# Altium PCB 板.PcbDoc (part 3 of 3)
Units mil, origin at the board's own origin, x right, y up, seen from the top; angles counter-clockwise.
Board outline 8500 x 4400 mil, 4 copper layers (Top Layer, 02gnd, 03vcc, Bottom Layer); 131 components, 485 nets, 1153 pads, 930 vias.
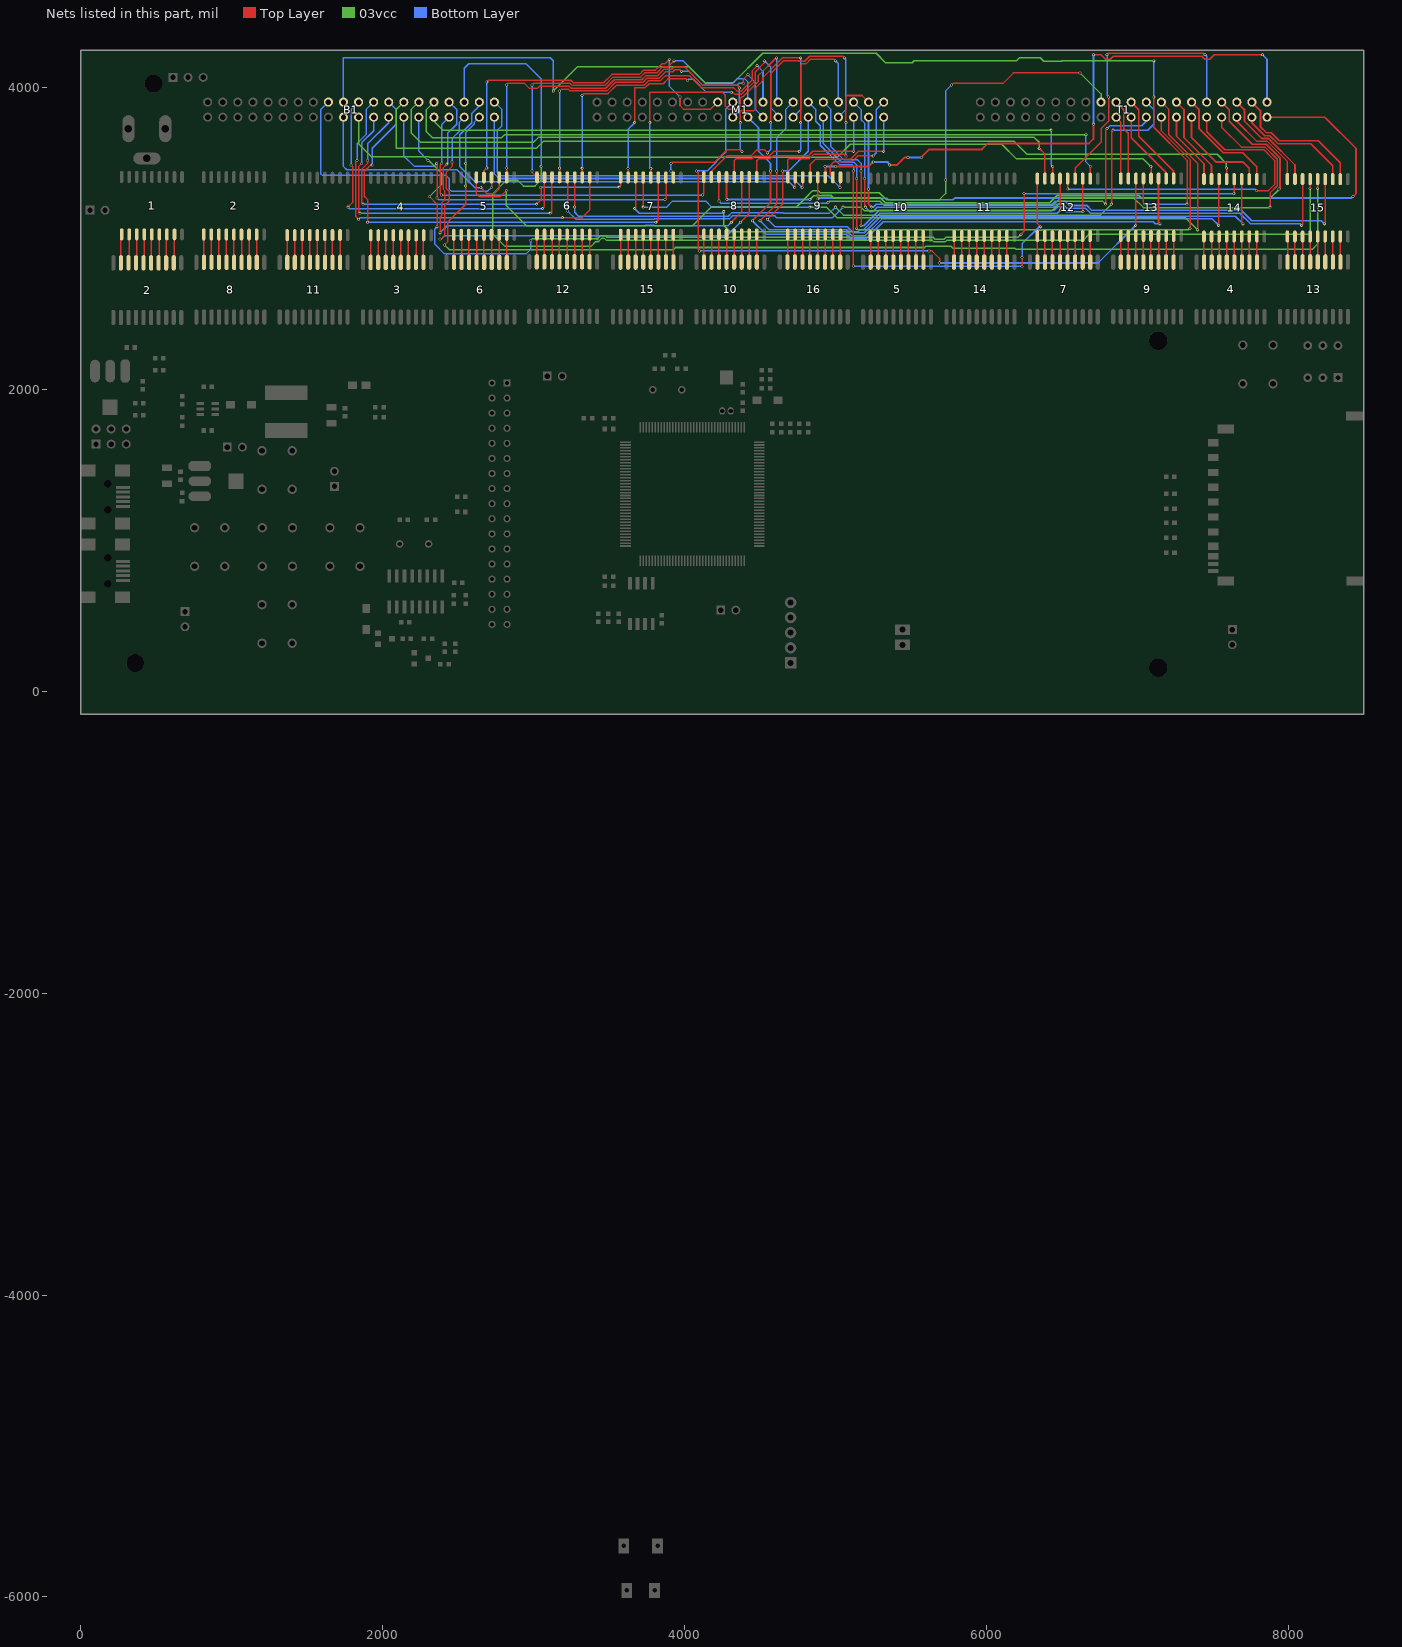
[diagram p5: the nets of this part, all layers, seen from the top]

## Via types
v1: diameter 19.68, hole 11.81, Top Layer to Bottom Layer, 922 vias
v2: diameter 118.11, hole 118.11, Top Layer to Bottom Layer, tented both sides, 4 vias
v3: diameter 50, hole 40, Top Layer to Bottom Layer, 2 vias
v4: diameter 39.37, hole 39.37, Top Layer to Bottom Layer, 2 vias

## Nets (pads, with @x,y where several pads share a name; then routed paths per layer and width w, separated by ;. In a path a pad name is that pad's centre, name@x,y a point inside that pad or via, vN(x,y) a via of type N, cw(c..) or ccw(c..) an arc to the next point about the centre after c; other vN are vias at no path point) (continued)
W52: 5.15@2621,3407 T1.29 | length 5405.5
  Top Layer w10: 5.15@2621,3407 2621,3299 2640,3280 2780,3280 v1(2820,3320) ; v1(5770,4020) 5780,4030 6110,4030 6180,4100 v1(6620,4100)
  03vcc w10: v1(2820,3320) 2820,3220 2952.72,3087.28 4052.72,3087.28 4175.43,3210 4740,3210 4796.22,3266.22 4850,3320 4886.56,3320 4900.86,3305.7 5290.86,3305.7 5336.56,3260 5690,3260 5730,3300 v1(5730,3390) ; v1(6620,4100) 6760,3960 T1.29@6760,3906.42
  Bottom Layer w10: v1(5730,3390) 5730,3980 v1(5770,4020)
W53: 5.14@2671,3407 M1.29 | length 2497.9
  Top Layer w10: 2671,3451 v1(2690,3470) ; v1(2690,4040) 2701.26,4051.26 3246.52,4051.26 3263.49,4034.29 3463.36,4034.29 3519.11,4090.04 3701.54,4090.04 3730,4118.5 3808.5,4118.5 3850,4160 3870,4160 v1(3900,4190) ; v1(3970,3940) 3970,3882.91 3992.91,3860 4173.58,3860 M1.29@4220,3906.42
  Bottom Layer w10: v1(2690,3470) v1(2690,4040) ; v1(3900,4190) 3900,4010 v1(3970,3940)
W54: 5.13@2721,3407 B1.29 | length 1792.5
  Top Layer w10: v1(2720,3340) 2721,3341 5.13@2721,3407
  Bottom Layer w10: B1.29@1640,3906.42 1590,3856.42 1590,3430 1600,3420 2420,3420 2440,3400 2440,3330 2453.72,3316.28 2696.28,3316.28 v1(2720,3340)
W55: 5.12@2771,3407 B1.10 | length 1520.8
  Top Layer w10: v1(2650,3340) 2690,3300 2740,3300 2771,3331 5.12@2771,3407
  Bottom Layer w10: B1.10@1740,3806.42 1740,3480 1762.13,3457.87 2492.13,3457.87 2610,3340 v1(2650,3340)
W56: 5.11@2821,3407 M1.10 | length 2519.9
  Top Layer w10: v1(2820,4020) 2830,4030 2940,4030 2972.72,3997.28 3025.16,3997.28 3040,4012.13 3235.1,4012.13 3248.68,3998.54 3478.17,3998.54 3533.92,4054.29 3716.34,4054.29 3744.18,4082.13 3822.68,4082.13 3864.81,4124.25 3914.81,4124.25 3930.56,4140 3999.49,4140 4122.76,4016.74 4356.74,4016.74 4356.74,4006.14 v1(4362.87,4000) ; 5.11@2821,3407 v1(2821,3469)
  Bottom Layer w10: v1(2820,4020) 2821,4019 v1(2821,3469) ; M1.10@4320,3806.42 4362.87,3849.29 v1(4362.87,4000)
W57: 13.18@6891.3,3400 T1.10 | length 419.4
  Top Layer w10: T1.10@6860,3806.42 6891.3,3775.12 13.18@6891.3,3400
W58: 13.17@6941.3,3400 T1.30 | length 540.1
  Top Layer w11.81: T1.30@6860,3906.42 6910,3856.42 6910,3782.98 6910.08,3782.9 6910.08,3729.92 6940.32,3699.69 6940.32,3400.98 13.17@6941.3,3400
W59: 13.16@6991.3,3400 M1.30 | length 4489.9
  Top Layer w10: v1(4080,3450) 4090,3440 4090,2930 v1(4100,2920) ; v1(5620,2920) 5640,2920 5690,2870 v1(5690,2840) ; v1(6990,3090) 6990,3398.7 13.16@6991.3,3400
  Bottom Layer w10: v1(4080,3450) 4150,3450 4271.79,3571.79 4271.79,3858.21 M1.30@4320,3906.42 ; v1(4100,2920) v1(5620,2920) ; v1(5690,2840) 6740,2840 v1(6990,3090)
W60: 13.15@7041.3,3400 B1.30 | length 7611.3
  Top Layer w10: 13.15@7041.3,3400 7041.3,3238.7 v1(7050,3230) ; v1(7110,3940) 7110,3740 7330,3520 v1(7330,3230)
  03vcc w10: v1(3130,3980) 3290,4140 4030,4140 4140,4030 4317.75,4030 4517.75,4230 5270,4230 5332.72,4167.28 5509.41,4167.28 5522.13,4180 6200,4180 6220,4200 6357.87,4200 6380.59,4177.28 6499.41,4177.28 6502.13,4180 v1(7110,4180)
  Bottom Layer w10: B1.30@1740,3906.42 1740,4200 3110,4200 3130,4180 v1(3130,3980) ; v1(7050,3230) v1(7330,3230) ; v1(7110,3940) v1(7110,4180)
W61: 13.14@7091.3,3400 B1.11 | length 5641.6
  Top Layer w10: v1(7090,3480) 7091.3,3478.7 13.14@7091.3,3400
  03vcc w10: B1.11@1840,3806.42 1840,3630 1927.28,3542.72 2309.41,3542.72 2312.13,3540 5010,3540 5097.56,3627.56 6102.44,3627.56 6200,3530 7040,3530 v1(7090,3480)
W62: 13.13@7141.3,3400 M1.11 | length 3904.3
  Top Layer w11.81: v1(4450,3120) 4570,3240 v1(4570,3450) ; 13.13@7141.3,3400 7141.3,3108.7 v1(7150,3100)
  Bottom Layer w11.81: M1.11@4420,3806.42 4490,3736.42 4490,3580 4570,3500 v1(4570,3450) ; v1(4450,3120) 4540,3030 5070,3030 5100,3000 5202.39,3000 5316.01,3113.62 7106.38,3113.62 7120,3100 v1(7150,3100)
W63: 13.12@7191.3,3400 T1.11 | length 502.2
  Top Layer w11.81: T1.11@6960,3806.42 6960,3670 7191.3,3438.7 13.12@7191.3,3400
W64: 13.11@7241.3,3400 T1.31 | length 622.9
  Top Layer w11.81: T1.31@6960,3906.42 7010,3856.42 7010,3680 7240,3450 7240,3401.3 13.11@7241.3,3400
W65: 6.18@3022,3408 M1.31 | length 2335.4
  Top Layer w10: 2990,3440 6.18@3022,3408 ; v1(2990,4020) 3000,4030 3242.5,4030 3256.08,4016.42 3470.76,4016.42 3526.51,4072.17 3708.94,4072.17 3736.77,4100 3815.28,4100 3857.4,4142.13 3892.13,4142.13 v1(3930,4180)
  Bottom Layer w10: v1(2990,3450) v1(2990,4020) ; v1(3930,4180) 3990,4180 4135.39,4034.61 4322.37,4034.61 4347.75,4060 4400,4060 4420,4040 M1.31@4420,3906.42
W66: 6.17@3072,3408 B1.31 | length 2240.8
  Top Layer w10: v1(1770,3210) 1800,3240 1800,3480 v1(1790,3490) ; v1(3060,3200) 3072,3212 6.17@3072,3408
  Bottom Layer w10: v1(1770,3210) 1780,3200 v1(3060,3200) ; v1(1790,3490) 1790,3856.42 B1.31@1840,3906.42
W67: 6.16@3122,3408 B1.12 | length 2180.8
  Top Layer w10: v1(1850,3170) 1840,3180 1840,3480 v1(1860,3500) ; v1(3110,3170) 3120,3170 3120,3406 6.16@3122,3408
  Bottom Layer w10: 1860,3170 v1(3110,3170) ; v1(1860,3500) 1860,3636.38 1940,3716.38 B1.12@1940,3806.42
W68: 6.15@3172,3408 M1.12 | length 2301.4
  Top Layer w10: 6.15@3172,3408 v1(3172,3468) ; v1(3172,3980) 3182,3990 3231.95,3990 3241.28,3980.67 3485.57,3980.67 3541.32,4036.42 3723.75,4036.42 3751.58,4064.25 3830.08,4064.25 3872.21,4106.38 3922.21,4106.38 3935.83,4120 3970,4120 v1(3980,4110) ; v1(4390,4030) 4390,4060 v1(4420,4090)
  Bottom Layer w10: v1(3172,3468) v1(3172,3980) ; v1(3980,4110) 4030,4110 4123.26,4016.74 4346.74,4016.74 4360,4030 v1(4390,4030) ; v1(4420,4090) 4420,4085.28 4470,4035.28 4470,3856.42 M1.12@4520,3806.42
W69: 6.14@3222,3408 T1.12 | length 4711.1
  Top Layer w10: 6.14@3222,3408 3225.36,3404.65 v1(3225.36,3184.64) ; v1(6790,3230) 6790,3720 v1(6800,3730)
  03vcc w10: v1(5050,3210) 5167.87,3210 5190.59,3187.28 6437.28,3187.28 6500,3250 6770,3250 v1(6790,3230)
  Bottom Layer w10: v1(3225.36,3184.64) 3280,3130 3797.87,3130 3800.59,3132.72 3819.41,3132.72 3820,3132.13 4297.4,3132.13 4317.99,3152.72 4597.28,3152.72 4610,3140 4980,3140 v1(5050,3210) ; v1(6800,3730) 6820,3750 7030,3750 7060,3780 T1.12@7060,3806.42
W70: 6.13@3272,3408 T1.32 | length 4828.8
  Top Layer w10: v1(3272,3212) 6.13@3272,3408 ; v1(6830,3230) 6830,3710 v1(6840,3720)
  03vcc w10: v1(5000,3210) 5052.72,3157.28 6757.28,3157.28 v1(6830,3230)
  Bottom Layer w10: v1(3272,3212) 3272,3175.87 3297.87,3150 3792.6,3150 3793.19,3150.59 3826.81,3150.59 3827.4,3150 4290,3150 4313.99,3173.99 4650.34,3173.99 4653.74,3170.59 4960.59,3170.59 v1(5000,3210) ; v1(6840,3720) 7070,3720 7110,3760 7110,3856.42 T1.32@7060,3906.42
W71: 6.12@3322,3408 M1.32 | length 2171.6
  Top Layer w10: v1(3321,3951) 3332.8,3962.8 3492.98,3962.8 3548.72,4018.54 3731.15,4018.54 3758.98,4046.38 3837.49,4046.38 3871.11,4080 4034.72,4080 4114.72,4000 4327.73,4000 4350.44,3977.28 4372.28,3977.28 4450,4055 4450,4115.28 4480,4145.28 v1(4480,4150) ; 6.12@3322,3408 v1(3322,3468)
  Bottom Layer w10: v1(3322,3468) v1@3322,3950 ; v1(4480,4150) 4520,4110 M1.32@4520,3906.42 ; v1@3322,3950 3322,3952 v1(3321,3951) v1@3322,3950
W72: 6.11@3372,3408 B1.32 | length 2608.1
  Top Layer w10: v1(1830,3520) 1820,3510 1820,3150 v1(1840,3130) ; v1(3190,3140) 3320,3140 3372,3192 6.11@3372,3408
  Bottom Layer w10: v1(1830,3520) 1830,3631.66 1890,3691.66 1890,3856.42 B1.32@1940,3906.42 ; v1(1840,3130) 1850,3140 v1(3190,3140)
W73: 7.18@3576.3,3407 B1.13 | length 2517.8
  Top Layer w10: v1(1870,3230) 1860,3240 1860,3460 1900,3500 v1(1900,3520) ; v1(3020,3230) 3050,3260 v1@3050,3340 ; v1(3567.28,3342.72) 3576.3,3351.73 7.18@3576.3,3407
  Bottom Layer w10: v1(1870,3230) v1(3020,3230) ; v1(1900,3520) 1900,3630 2040,3770 B1.13@2040,3806.42 ; v1@3045,3342.72 v1(3567.28,3342.72)
  other v1: 3045,3340
W74: 7.17@3626.3,3407 M1.13 | length 2087.1
  Top Layer w10: 7.17@3626.3,3407 v1(3626.3,3466.3) ; v1(3670,3770) 3670,4000 3670.67,4000.67 3738.55,4000.67 3766.39,4028.5 3858.5,4028.5 3890,4060 4010,4060 v1(4020,4050) ; v1(4310,3970) 4320.99,3970 4331.58,3959.41 4379.69,3959.41 4470,4049.72 4470,4107.87 4530,4167.87 v1(4530,4180)
  Bottom Layer w10: v1(3626.3,3466.3) 3626.3,3726.3 v1(3670,3770) ; v1(4020,4050) 4027.36,4057.36 4057.36,4057.36 4144.72,3970 v1(4310,3970) ; v1(4530,4180) 4570,4140 4570,3870 4620,3820 M1.13@4620,3806.42
W75: 7.16@3676.3,3407 T1.13 | length 4844.5
  Top Layer w10: v1(3670,3200) 3676.3,3206.3 7.16@3676.3,3407 ; T1.13@7160,3806.42 7160,3715.28 7352.72,3522.56 v1@7352.72,3067.28
  03vcc w10: v1(4260,3180) 4260,3090 4302.72,3047.28 5149.41,3047.28 5162.13,3060 6347.87,3060 6350.59,3057.28 6369.41,3057.28 6372.13,3060 7340,3060 v1(7350,3070)
  Bottom Layer w10: v1(3670,3200) 3700,3170 4250,3170 v1(4260,3180)
W76: 7.15@3726.3,3407 T1.33 | length 4912.3
  Top Layer w10: v1(3726.3,3210) 7.15@3726.3,3407 ; T1.33@7160,3906.42 7210,3856.42 7210,3690.56 7400,3500.56 v1(7400,3060)
  03vcc w10: v1(4830,3210) 4940,3210 5010.59,3139.41 7320.59,3139.41 v1(7400,3060)
  Bottom Layer w10: v1(3726.3,3210) 3880,3210 3920,3250 4102.6,3250 4103.19,3249.41 4136.81,3249.41 4137.4,3250 4140,3250 4176.01,3213.99 4550.08,3213.99 4554.07,3210 v1(4830,3210)
W77: 7.14@3776.3,3407 M1.33 | length 1983.9
  Top Layer w10: v1(3770,3770) 3770,3970 4250.99,3970 4270,3950.99 4270,3880 4290,3860 4350,3860 4370,3880 4370,3931.54 4380,3941.54 4387.09,3941.54 4490,4044.44 4490,4082.64 4607.36,4200 v1(4610,4200) ; 7.14@3776.3,3407 v1(3776.3,3466.3)
  Bottom Layer w10: v1(3770,3770) 3770,3472.6 v1(3776.3,3466.3) ; v1(4610,4200) 4610,3916.42 M1.33@4620,3906.42
W78: 7.13@3826.3,3407 B1.33 | length 3133.8
  Top Layer w10: v1(1900,3110) 1900,3260 1877.87,3282.13 1877.87,3447.87 1920,3490 v1(1930,3490) ; v1(3810,3110) 3826.3,3126.3 7.13@3826.3,3407
  Bottom Layer w10: v1(1900,3110) 2357.5,3110 3312.5,3110 v1(3810,3110) ; v1(1930,3490) 1930,3600 2090,3760 2090,3856.42 B1.33@2040,3906.42
W79: 7.12@3876.3,3407 B1.14 | length 2410.5
  Top Layer w10: v1(2357.5,3500) 2360,3500 v1(2360,3270) ; v1(3870,3260) 3880,3270 3880,3403.3 7.12@3876.3,3407
  Bottom Layer w10: B1.14@2140,3806.42 2140,3550 2210,3480 2337.5,3480 v1(2357.5,3500) ; v1(2360,3270) 2370,3260 v1(3870,3260)
W80: 7.11@3926.3,3407 M1.14 | length 1961.9
  Top Layer w10: v1(3910,3450) 3926.3,3433.7 7.11@3926.3,3407 ; v1(3910,3500) 3917.01,3507.01 4199.13,3507.01 4282.13,3590 4370,3590 v1(4380,3580) ; v1(4370,3770) 4370,3850 4460,3850 4470.42,3860.42 4470.42,3999.58 4520,4049.17 4520,4070 4650,4200 v1(4770,4200) ; M1.14@4720,3806.42 M1.14@4720,3820
  Bottom Layer w10: 3910,3440 v1(3910,3450) v1(3910,3500) ; v1(4370,3770) 4370,3590 v1(4380,3580) ; M1.14@4720,3806.42 4770,3856.42 v1(4770,4200)
W81: 14.18@7442.3,3396 T1.14 | length 485.9
  Top Layer w11.81: T1.14@7260,3806.42 7260,3680 7442.3,3497.7 14.18@7442.3,3396
W82: 14.17@7492.3,3396 T1.34 | length 606.6
  Top Layer w11.81: T1.34@7260,3906.42 7310,3856.42 7310,3670 7492.3,3487.7 14.17@7492.3,3396
W83: 14.16@7542.3,3396 M1.34 | length 4330
  Top Layer w10: v1(4500,3120) 4610,3230 v1(4610,3450) ; v1(7540,3090) 7540,3393.7 14.16@7542.3,3396
  Bottom Layer w10: v1(4500,3120) 4560,3060 5070,3060 5110,3020 5195.83,3020 5308.23,3132.4 7497.6,3132.4 v1(7540,3090) ; v1(4610,3450) 4610,3670 4670,3730 4670,3856.42 M1.34@4720,3906.42
W84: 14.15@7592.3,3396 B1.34 | length 6011.1
  Top Layer w10: v1(7590,3470) 7592.3,3467.7 14.15@7592.3,3396
  03vcc w10: B1.34@2140,3906.42 2090,3856.42 2090,3600 3020,3600 3065.43,3645.43 6184.57,3645.43 6270,3560 7530,3560 7590,3500 v1(7590,3470)
W85: 14.14@7642.3,3396 B1.15 | length 6739.2
  Top Layer w10: v1(2310,3280) 2360,3230 v1(2360,3080) ; v1(6230,3030) 6250,3050 v1(6250,3300) ; 7640,3310 7642.3,3312.3 14.14@7642.3,3396
  03vcc w10: v1(2300,3520) 2305.37,3520 2390,3435.37 2390,3360 v1(2310,3280) ; v1(2980,2990) 2990,3000 3422.6,3000 3443.19,3020.59 3476.81,3020.59 3487.4,3010 5647.87,3010 5660.59,2997.28 5719.41,2997.28 5732.13,3010 6210,3010 v1@6227.87,3027.87
  Bottom Layer w10: B1.15@2240,3806.42 2240,3580 v1(2300,3520) ; v1(2360,3080) 2345,3065 2345,2965 2410,2900 2950,2900 2980,2930 v1(2980,2990) ; v1(6250,3300) v1(7640,3300)
W86: 14.13@7692.3,3396 M1.15 | length 4364.7
  Top Layer w10: v1(4550,3130) 4650,3230 v1(4650,3450) ; 14.13@7692.3,3396 7692.3,3107.7 v1(7700,3100)
  Bottom Layer w10: v1(4550,3130) 4600,3080 5080,3080 5120,3040 5190.56,3040 5300.83,3150.28 7649.72,3150.28 v1(7700,3100) ; v1(4650,3450) 4690,3450 4820,3580 M1.15@4820,3806.42
W87: 14.12@7742.3,3396 T1.15 | length 674.2
  Top Layer w11.81: T1.15@7360,3806.42 7360,3670 7520,3510 7700,3510 7742.3,3467.7 14.12@7742.3,3396
W88: 14.11@7792.3,3396 T1.35 | length 765.6
  Top Layer w11.81: T1.35@7360,3906.42 7410,3856.42 7410,3730 7570,3570 7700,3570 7792.3,3477.7 14.11@7792.3,3396
W89: 12.18@6338.3,3399 M1.35 | length 3025.6
  Top Layer w10: v1(5120,2820) 5117.28,2822.72 5117.28,3447.28 v1(5120,3450) ; v1(6237.28,2817.28) v1(6237.28,2877.28) ; 12.18@6338.3,3399 6338.3,3101.7 v1(6360,3080)
  Bottom Layer w10: M1.35@4820,3906.42 4870,3856.42 4870,3780 4900,3750 4900,3620 5030,3490 5110,3490 5120,3480 v1(5120,3450) ; v1(5120,2820) 5122.72,2817.28 v1(6237.28,2817.28) ; v1(6237.28,2877.28) 6237.28,2967.28 6350,3080 v1(6360,3080)
W90: 12.17@6388.3,3399 B1.35 | length 4697.6
  Top Layer w10: v1(6350,3600) 6388.3,3561.7 12.17@6388.3,3399
  03vcc w10: B1.35@2240,3906.42 2236.42,3906.42 2190,3860 2190,3700 2250,3640 3000,3640 3032.13,3672.13 6317.87,3672.13 6350,3640 v1(6350,3600)
W91: 12.16@6438.3,3399 B1.16 | length 4467.1
  Top Layer w10: 12.16@6438.3,3399 6440,3400.7 v1(6440,3480)
  03vcc w10: B1.16@2340,3806.42 2340,3780 2400,3720 v1(6430,3720)
  Bottom Layer w10: v1(6430,3720) 6430,3490 v1(6440,3480)
W92: 12.15@6488.3,3399 M1.16 | length 2494.4
  Top Layer w10: v1(5140,3070) v1(5140,3400) ; 12.15@6488.3,3399 6490,3397.3 v1(6490,3190)
  Bottom Layer w10: M1.16@4920,3806.42 4920,3630 5042.13,3507.87 5122.13,3507.87 5142.72,3487.28 5142.72,3402.72 v1(5140,3400) ; v1(5140,3070) 5150,3060 5185.28,3060 5295.28,3170 6470,3170 v1(6490,3190)
W93: 12.14@6538.3,3399 T1.16 | length 2244.1
  Top Layer w10: v1@6538.3,3330 12.14@6538.3,3398.3 ; T1.16@7460,3806.42 7460,3710 7580,3590 7840,3590 7910,3520 7910,3360 7870,3320 v1(7790,3320)
  Bottom Layer w10: v1(6540,3330) 7780,3330 v1(7790,3320)
W94: 12.13@6588.3,3399 T1.36 | length 1893
  Top Layer w10: 12.13@6588.3,3399 6588.3,3468.3 6760,3640 6760,3730 6810,3780 v1(6810,3940) ; v1(6800,4220) 6810,4230 7440,4230 v1(7450,4220)
  Bottom Layer w10: v1(6800,4220) 6800,3950 v1(6810,3940) ; v1(7450,4220) 7460,4210 T1.36@7460,3906.42
W95: 12.12@6638.3,3399 M1.36 | length 2726.5
  Top Layer w10: v1(5170,3090) v1(5170,3450) ; 12.12@6638.3,3399 6640,3397.3 v1(6640,3180)
  Bottom Layer w10: M1.36@4920,3906.42 4970,3856.42 4970,3610 5054.25,3525.75 5144.25,3525.75 5170,3500 v1(5170,3450) ; v1@5172.64,3087.36 5187.36,3087.36 5290,3190 6450,3190 6472.72,3212.72 6499.41,3212.72 6512.72,3199.41 6512.72,3197.28 6530,3180 v1(6640,3180)
W96: 12.11@6688.3,3399 B1.36 | length 4916.1
  Top Layer w10: 12.11@6688.3,3399 6690,3400.7 v1(6690,3480)
  03vcc w10: B1.36@2340,3906.42 2290,3856.42 2290,3710 2330,3670 2787.87,3670 2807.87,3690 v1(6660,3690)
  Bottom Layer w10: v1(6660,3690) 6660,3510 v1(6690,3480)
W97: 8.18@4128.3,3409 B1.17 | length 2397.9
  Top Layer w10: v1(2390,3290) 2380,3300 2380,3490 v1(2390,3500) ; v1(4120,3290) 4128.3,3298.3 8.18@4128.3,3409
  Bottom Layer w10: v1(2390,3290) v1(4120,3290) ; v1(2390,3500) 2390,3756.42 B1.17@2440,3806.42
W98: 8.17@4178.3,3409 M1.17 | length 1973.6
  Top Layer w10: 8.17@4178.3,3409 4178.3,3448.3 4280,3550 4440,3550 4480,3590 4530,3590 v1(4550,3570) ; v1(4570,3770) 4570,4094.72 4655.28,4180 4757.87,4180 4760.59,4177.28 4797.28,4177.28 4830,4210 5050,4210 v1(5060,4200)
  Bottom Layer w10: v1(4550,3570) 4570,3590 v1(4570,3770) ; M1.17@5020,3806.42 5070,3856.42 5070,4190 v1(5060,4200)
W99: 8.16@4228.3,3409 T1.17 | length 4741.4
  Top Layer w10: v1(4228.3,3250) 8.16@4228.3,3409 ; T1.17@7560,3806.42 7560,3737.87 7690,3607.87 7847.4,3607.87 7927.87,3527.4 7927.87,3352.6 7880,3304.72 v1(7880,3210)
  03vcc w10: v1(4950,3240) 4960,3250 5293.44,3250 5322.22,3221.22 6441.22,3221.22 6487.87,3267.87 6980,3267.87 7040.59,3207.28 7872.72,3207.28 v1@7880,3214.57
  Bottom Layer w10: v1(4228.3,3250) 4241.01,3237.28 4947.28,3237.28 v1(4950,3240)
W100: 8.15@4278.3,3409 T1.37 | length 4684.2
  Top Layer w11.81: v1@4278.3,3260 8.15@4278.3,3409 ; T1.37@7560,3906.42 7610,3856.42 7610,3780 7763.35,3626.65 7855.18,3626.65 7946.65,3535.18 7946.65,3336.65 v1(7940,3330)
  03vcc w11.81: v1(4830,3260) 4856.38,3286.38 4872.97,3286.38 4873.51,3286.92 4893.08,3286.92 4893.63,3286.38 4909.18,3286.38 4909.73,3286.92 4973.08,3286.92 4990,3270 5300,3270 5330,3240 6420,3240 6466.65,3286.65 7013.35,3286.65 7030,3270 7880,3270 v1(7940,3330)
  Bottom Layer w11.81: v1(4280,3260) v1(4830,3260)
W101: 8.14@4328.3,3409 M1.37 | length 1673.3
  Top Layer w10: 8.14@4328.3,3409 4328.3,3518.3 4340,3530 4445.28,3530 4462.56,3547.28 4559.41,3547.28 4592.13,3580 v1(4760,3580) ; v1(4770,3770) 4770,4150 4779.41,4159.41 4804.69,4159.41 4835.28,4190 4990,4190 v1(5000,4180)
  Bottom Layer w10: v1(4760,3580) 4770,3590 v1(4770,3770) ; v1(5000,4180) 5020,4160 M1.37@5020,3906.42
W102: 8.13@4378.3,3409 B1.37 | length 3229.5
  Top Layer w10: v1(2380,3040) 2380,3142.5 2390,3152.5 2390,3237.5 2410,3257.5 2410,3320 2400,3330 2400,3470 v1(2425,3495) ; v1(4310,3110) 4378.3,3178.3 8.13@4378.3,3409
  Bottom Layer w10: v1(2380,3040) 2427.28,3087.28 3739.41,3087.28 3742.13,3090 3797.87,3090 3800.59,3087.28 4287.28,3087.28 v1(4310,3110) ; v1(2425,3495) 2430,3500 2430,3700 2490,3760 2490,3856.42 B1.37@2440,3906.42
W103: 8.12@4428.3,3409 B1.18 | length 3253.8
  Top Layer w10: v1(2380,3000) 2390,3000 2410,3020 2410,3218.96 2440,3248.96 2440,3315.28 2420,3335.28 2420,3440 2460,3480 v1(2460,3510) ; v1(4370,3110) 4428.3,3168.3 8.12@4428.3,3409
  Bottom Layer w10: v1(2380,3000) 2390,3000 2410,3020 4280,3020 v1(4370,3110) ; v1(2460,3510) 2460,3665.28 2507.87,3713.15 2507.87,3774.29 B1.18@2540,3806.42
W104: 8.11@4478.3,3409 M1.18 | length 1003
  Top Layer w10: 8.11@4478.3,3409 4478.3,3518.3 4489.41,3529.41 4566.81,3529.41 4587.4,3550 4820,3550 4850,3580 v1(5120,3580)
  Bottom Layer w10: v1(5120,3580) M1.18@5120,3806.42
W105: 15.18@7995.3,3396 T1.18 | length 589.4
  Top Layer w10: T1.18@7660,3806.42 7660,3780 7794.57,3645.43 7862.96,3645.43 7995.3,3513.09 15.18@7995.3,3396
W106: 15.17@8045.3,3396 T1.38 | length 695.9
  Top Layer w11.81: T1.38@7660,3906.42 7710,3856.42 7710,3780.73 7826.52,3664.21 7870.74,3664.21 8045.3,3489.65 15.17@8045.3,3396
W107: 15.16@8095.3,3396 M1.38 | length 4020.6
  Top Layer w10: v1(5192.72,3400) 5192.72,3217.28 v1(5200,3210) ; v1(8090,3090) 8095.3,3095.3 15.16@8095.3,3396
  Bottom Layer w10: M1.38@5120,3906.42 5170,3856.42 5170,3790 5192.72,3767.28 v1(5192.72,3400) ; v1(5200,3210) 5230,3180 5246.56,3180 5276.56,3210 6444.72,3210 6465.31,3230.59 6506.81,3230.59 6530.59,3206.81 6530.59,3204.69 6532.56,3202.72 6657.28,3202.72 6690,3170 7680,3170 7750,3100 8080,3100 v1(8090,3090)
W108: 15.15@8145.3,3396 B1.38 | length 7984.7
  Top Layer w10: v1(8145.3,3334.7) 15.15@8145.3,3396
  03vcc w10: v1(3050,3480) 3050,3390 3010,3350 2932.13,3350 2892.13,3390 2820,3390 2730,3300 2730,3030 2810,2950 3380,2950 3412.13,2982.13 3430,2982.13 3450.59,3002.72 3469.41,3002.72 3482.13,2990 5642.6,2990 5653.19,2979.41 5726.81,2979.41 5737.4,2990 6640,2990 6680,3030 8145.3,3030 v1(8145.3,3334.7)
  Bottom Layer w10: B1.38@2540,3906.42 2540,4130 2570,4160 2950,4160 3050,4060 v1(3050,3480)
W109: 15.14@8195.3,3396 B1.19 | length 7203.6
  Top Layer w10: v1(2410,2960) 2430,2980 2430,3110 2550,3230 v1(2550,3350) ; v1(8195.3,3334.7) 15.14@8195.3,3396
  03vcc w10: v1(2410,2960) 2442.72,2927.28 3924.57,2927.28 3940,2942.72 5590.59,2942.72 5597.87,2950 5767.28,2950 5780,2937.28 6189.41,2937.28 6196.69,2930 8160,2930 8195.3,2965.3 v1(8195.3,3334.7) ; v1(2550,3350) v1(2550,3500)
  Bottom Layer w10: v1(2550,3500) 2550,3704.72 2607.87,3762.6 2607.87,3774.29 B1.19@2640,3806.42
W110: 15.13@8245.3,3396 M1.19 | length 3981.1
  Top Layer w11.81: v1(5220,3330) 5220,3230 v1(5240,3210) ; v1(8240,3100) 8245.3,3105.3 15.13@8245.3,3396
  Bottom Layer w11.81: v1(5220,3330) M1.19@5220,3806.42 ; v1(5240,3210) 5250,3210 5270,3230 6438.16,3230 6457.53,3249.37 6522.13,3249.37 6550,3221.5 6665.43,3221.5 6696.93,3190 7688.78,3190 7758.78,3120 8220,3120 v1(8240,3100)
W111: 15.12@8295.3,3396 T1.19 | length 778.6
  Top Layer w11.81: T1.19@7760,3806.42 7760,3770 7846.1,3683.9 7878.89,3683.9 7932.79,3630 8150,3630 8295.3,3484.7 15.12@8295.3,3396
W112: 15.11@8345.3,3396 T1.39 | length 922.7
  Top Layer w11.81: T1.39@7760,3906.42 7816.22,3850.2 7816.22,3743.78 7856.42,3703.58 7887.05,3703.58 7940.63,3650 8200,3650 8345.3,3504.7 15.11@8345.3,3396
W113: 9.18@4683.3,3408 M1.39 | length 1085.3
  Top Layer w10: 9.18@4683.3,3408 4683.3,3523.3 4692.13,3532.13 4827.4,3532.13 4857.4,3562.13 5057.87,3562.13 v1(5070,3550) ; v1(5070,3770) 5070,3940 5080,3950 5176.42,3950 M1.39@5220,3906.42
  Bottom Layer w10: v1(5070,3550) v1(5070,3770)
W114: 9.17@4733.3,3408 B1.39 | length 2827.6
  Top Layer w10: v1(4730,3340) 4730,3404.7 9.17@4733.3,3408
  Bottom Layer w10: B1.39@2640,3906.42 2640,3880 2590,3830 2590,3770 2510,3690 2510,3480 2610,3380 4690,3380 v1(4730,3340)
W115: 9.16@4783.3,3408 B1.20 | length 2523.1
  Top Layer w10: v1(4780,3340) 4783.3,3343.3 9.16@4783.3,3408
  Bottom Layer w10: B1.20@2740,3806.42 2740,3430 2770,3400 4720,3400 v1(4780,3340)
W116: 9.15@4833.3,3408 M1.20 | length 834.3
  Top Layer w10: 9.15@4833.3,3408 4833.3,3493.3 4867.28,3527.28 5099.41,3527.28 5152.13,3580 v1(5320,3580)
  Bottom Layer w10: v1(5320,3580) M1.20@5320,3806.42
W117: 9.14@4883.3,3408 T1.20 | length 4701.4
  Top Layer w11.81: v1(4883.3,3263.3) 9.14@4883.3,3408 ; T1.20@7860,3806.42 8243.58,3806.42 8450,3600 8450,3300 v1(8430,3280)
  Bottom Layer w11.81: 4891.22,3271.22 5194.82,3271.22 5197.53,3268.5 5340,3268.5 5350,3258.5 5778.5,3258.5 5790,3270 8420,3270 v1(8430,3280)
W118: 9.13@4933.3,3408 T1.40 | length 3996.5
  Top Layer w11.81: v1(4930,3480) 4933.3,3476.7 9.13@4933.3,3408 ; v1(5000,3480) 5220,3480 v1(5250,3510) ; v1(5360,3490) 5410,3490 5460,3540 v1(5480,3540) ; v1(5570,3540) 5622.48,3592.48 5970.63,3592.48 6010,3631.85 6679.69,3631.85 6710,3662.16 v1(6710,3760) ; v1(6710,4220) 6760,4220 6790,4190 6820,4190 6840,4210 7426.59,4210 7446.59,4190 7480,4190 7510,4220 v1(7830,4220)
  Bottom Layer w11.81: v1(4930,3480) v1(5000,3480) ; v1(5250,3510) 5350,3510 5350,3500 v1(5360,3490) ; v1(5480,3540) v1(5570,3540) ; v1(6710,3760) v1(6710,4220) ; v1(7830,4220) 7860,4190 T1.40@7860,3906.42
W119: 9.12@4983.3,3408 M1.40 | length 781.9
  Top Layer w10: 9.12@4983.3,3408 4965,3426.3 4965,3485 4989.41,3509.41 5106.81,3509.41 5147.4,3550 v1(5250,3550)
  Bottom Layer w10: v1(5250,3550) 5270,3570 5270,3856.42 M1.40@5320,3906.42
W120: 9.11@5033.3,3408 B1.40 | length 2882.1
  Top Layer w10: v1(5030,3340) 5030,3404.7 9.11@5033.3,3408
  Bottom Layer w10: B1.40@2740,3906.42 2790,3856.42 2790,3750 2757.87,3717.87 2757.87,3442.13 2782.13,3417.87 4952.13,3417.87 v1(5030,3340)
XIN: 
XOUT: 
XQ1: 1.1 2.19 | length 191
  Top Layer w10: 2.19@265,2841.1 265,3025 1.1@270,3030
XQ2: 1.2 2.18@315,2841.1 | length 191
  Top Layer w10: 2.18@315,2841.1 320,2846.1 1.2@320,3030
XQ3: 1.3 2.17@365,2841.1 | length 191
  Top Layer w10: 2.17@365,2841.1 370,2846.1 1.3@370,3030
XQ4: 1.4 2.16@415,2841.1 | length 191
  Top Layer w10: 2.16@415,2841.1 420,2846.1 1.4@420,3030
XQ5: 1.5 2.15@465,2841.1 | length 191
  Top Layer w10: 2.15@465,2841.1 465,3025 1.5@470,3030
XQ6: 1.6 2.14@515,2841.1 | length 191
  Top Layer w10: 2.14@515,2841.1 520,2846.1 1.6@520,3030
XQ7: 1.7 2.13@565,2841.1 | length 191
  Top Layer w10: 2.13@565,2841.1 565,3025 1.7@570,3030
XQ8: 1.8 2.12@615,2841.1 | length 191
  Top Layer w10: 2.12@615,2841.1 620,2846.1 1.8@620,3030
XQ9: 5.19 10.1@5232.3,3020 | length 174.5
  Top Layer w10: 10.1@5232.3,3020 5233.85,3018.45 5.19@5233.85,2846.09
XQ10: 5.18@5283.85,2846.09 10.2@5282.3,3020 | length 174.5
  Top Layer w10: 10.2@5282.3,3020 5282.3,2847.64 5.18@5283.85,2846.09
XQ11: 5.17@5333.85,2846.09 10.3@5332.3,3020 | length 174.5
  Top Layer w10: 10.3@5332.3,3020 5333.85,3018.45 5.17@5333.85,2846.09
XQ12: 5.16@5383.85,2846.09 10.4@5382.3,3020 | length 174.5
  Top Layer w10: 10.4@5382.3,3020 5382.3,2847.64 5.16@5383.85,2846.09
XQ13: 5.15@5433.85,2846.09 10.5@5432.3,3020 | length 174.5
  Top Layer w10: 10.5@5432.3,3020 5433.85,3018.45 5.15@5433.85,2846.09
XQ14: 5.14@5483.85,2846.09 10.6@5482.3,3020 | length 174.5
  Top Layer w10: 10.6@5482.3,3020 5482.3,2847.64 5.14@5483.85,2846.09
XQ15: 5.13@5533.85,2846.09 10.7@5532.3,3020 | length 174.5
  Top Layer w10: 10.7@5532.3,3020 5533.85,3018.45 5.13@5533.85,2846.09
XQ16: 5.12@5583.85,2846.09 10.8@5582.3,3020 | length 174.5
  Top Layer w10: 10.8@5582.3,3020 5582.3,2847.64 5.12@5583.85,2846.09
XQ17: 2.1@814,3029 8.19 | length 185.4
  Top Layer w10: 2.1@814,3029 814,2845.22 8.19@815.12,2844.09
XQ18: 2.2@864,3029 8.18@865.12,2844.09 | length 185.4
  Top Layer w10: 2.2@864,3029 865.12,3027.88 8.18@865.12,2844.09
XQ19: 2.3@914,3029 8.17@915.12,2844.09 | length 185.4
  Top Layer w10: 2.3@914,3029 914,2845.22 8.17@915.12,2844.09
XQ20: 2.4@964,3029 8.16@965.12,2844.09 | length 183.8
  Top Layer w10: 8.16@964,2845.22 2.4@964,3029
XQ21: 2.5@1014,3029 8.15@1015.12,2844.09 | length 185.4
  Top Layer w10: 2.5@1014,3029 1014,2845.22 8.15@1015.12,2844.09
XQ22: 2.6@1064,3029 8.14@1065.12,2844.09 | length 185.4
  Top Layer w10: 2.6@1064,3029 1065.12,3027.88 8.14@1065.12,2844.09
XQ23: 2.7@1114,3029 8.13@1115.12,2844.09 | length 185.4
  Top Layer w10: 2.7@1114,3029 1114,2845.22 8.13@1115.12,2844.09
XQ24: 2.8@1164,3029 8.12@1165.12,2844.09 | length 185.4
  Top Layer w10: 2.8@1164,3029 1165.12,3027.88 8.12@1165.12,2844.09
XQ25: 3.1@1367,3025 11.19 | length 181.1
  Top Layer w10: 3.1@1367,3025 1367,2844.64 11.19@1367.55,2844.09
XQ26: 3.2@1417,3025 11.18@1417.55,2844.09 | length 181.1
  Top Layer w10: 3.2@1417,3025 1417.55,3024.45 11.18@1417.55,2844.09
XQ27: 3.3@1467,3025 11.17@1467.55,2844.09 | length 181.1
  Top Layer w10: 3.3@1467,3025 1467,2844.64 11.17@1467.55,2844.09
XQ28: 3.4@1517,3025 11.16@1517.55,2844.09 | length 181.1
  Top Layer w10: 3.4@1517,3025 1517.55,3024.45 11.16@1517.55,2844.09
XQ29: 3.5@1567,3025 11.15@1567.55,2844.09 | length 181.1
  Top Layer w10: 3.5@1567,3025 1567,2844.64 11.15@1567.55,2844.09
XQ30: 3.6@1617,3025 11.14@1617.55,2844.09 | length 181.1
  Top Layer w10: 3.6@1617,3025 1617.55,3024.45 11.14@1617.55,2844.09
XQ31: 3.7@1667,3025 11.13@1667.55,2844.09 | length 181.1
  Top Layer w10: 3.7@1667,3025 1667,2844.64 11.13@1667.55,2844.09
XQ32: 3.8@1717,3025 11.12@1717.55,2844.09 | length 181.1
  Top Layer w10: 3.8@1717,3025 1717.55,3024.45 11.12@1717.55,2844.09
XQ33: 11.1@5786.3,3020 14.19 | length 173.9
  Top Layer w10: 14.19@5786.28,2846.09 11.1@5786.3,3020
XQ34: 11.2@5836.3,3020 14.18@5836.28,2846.09 | length 173.9
  Top Layer w10: 14.18@5836.28,2846.09 11.2@5836.3,3020
XQ35: 11.3@5886.3,3020 14.17@5886.28,2846.09 | length 173.9
  Top Layer w10: 14.17@5886.28,2846.09 11.3@5886.3,3020
XQ36: 11.4@5936.3,3020 14.16@5936.28,2846.09 | length 173.9
  Top Layer w10: 14.16@5936.28,2846.09 11.4@5936.3,3020
XQ37: 11.5@5986.3,3020 14.15@5986.28,2846.09 | length 173.9
  Top Layer w10: 14.15@5986.28,2846.09 11.5@5986.3,3020
XQ38: 11.6@6036.3,3020 14.14@6036.28,2846.09 | length 173.9
  Top Layer w10: 14.14@6036.28,2846.09 11.6@6036.3,3020
XQ39: 11.7@6086.3,3020 14.13@6086.28,2846.09 | length 173.9
  Top Layer w10: 14.13@6086.28,2846.09 11.7@6086.3,3020
XQ40: 11.8@6136.3,3020 14.12@6136.28,2846.09 | length 173.9
  Top Layer w10: 14.12@6136.28,2846.09 11.8@6136.3,3020
XQ41: 3.19 4.1@1921,3024 | length 180.3
  Top Layer w10: 3.19@1919.98,2844.09 1921,2845.12 4.1@1921,3024
XQ42: 3.18@1969.98,2844.09 4.2@1971,3024 | length 180.3
  Top Layer w10: 3.18@1969.98,2844.09 1969.98,3022.98 4.2@1971,3024
XQ43: 3.17@2019.98,2844.09 4.3@2021,3024 | length 180.3
  Top Layer w10: 3.17@2019.98,2844.09 2021,2845.12 4.3@2021,3024
XQ44: 3.16@2069.98,2844.09 4.4@2071,3024 | length 180.3
  Top Layer w10: 3.16@2069.98,2844.09 2069.98,3022.98 4.4@2071,3024
XQ45: 3.15@2119.98,2844.09 4.5@2121,3024 | length 180.3
  Top Layer w10: 3.15@2119.98,2844.09 2121,2845.12 4.5@2121,3024
XQ46: 3.14@2169.98,2844.09 4.6@2171,3024 | length 180.3
  Top Layer w10: 3.14@2169.98,2844.09 2169.98,3022.98 4.6@2171,3024
XQ47: 3.13@2219.98,2844.09 4.7@2221,3024 | length 180.3
  Top Layer w10: 3.13@2219.98,2844.09 2221,2845.12 4.7@2221,3024
XQ48: 3.12@2269.98,2844.09 4.8@2271,3024 | length 180.3
  Top Layer w10: 3.12@2269.98,2844.09 2269.98,3022.98 4.8@2271,3024
XQ49: 5.1@2471,3027 6.19 | length 183.5
  Top Layer w10: 5.1@2471,3027 2471,2845.5 6.19@2472.41,2844.09
XQ50: 5.2@2521,3027 6.18@2522.41,2844.09 | length 183.5
  Top Layer w10: 5.2@2521,3027 2522.41,3025.59 6.18@2522.41,2844.09
XQ51: 5.3@2571,3027 6.17@2572.41,2844.09 | length 183.5
  Top Layer w10: 5.3@2571,3027 2571,2845.5 6.17@2572.41,2844.09
XQ52: 5.4@2621,3027 6.16@2622.41,2844.09 | length 183.5
  Top Layer w10: 5.4@2621,3027 2622.41,3025.59 6.16@2622.41,2844.09
XQ53: 5.5@2671,3027 6.15@2672.41,2844.09 | length 183.5
  Top Layer w10: 5.5@2671,3027 2671,2845.5 6.15@2672.41,2844.09
XQ54: 5.6@2721,3027 6.14@2722.41,2844.09 | length 183.5
  Top Layer w10: 5.6@2721,3027 2722.41,3025.59 6.14@2722.41,2844.09
XQ55: 5.7@2771,3027 6.13@2772.41,2844.09 | length 183.5
  Top Layer w10: 5.7@2771,3027 2771,2845.5 6.13@2772.41,2844.09
XQ56: 5.8@2821,3027 6.12@2822.41,2844.09 | length 183.5
  Top Layer w10: 5.8@2821,3027 2822.41,3025.59 6.12@2822.41,2844.09
XQ57: 9.19 13.1@6891.3,3020 | length 174
  Top Layer w10: 9.19@6891.13,2846.09 6891.13,3019.84 13.1@6891.3,3020
XQ58: 9.18@6941.13,2846.09 13.2@6941.3,3020 | length 174
  Top Layer w10: 9.18@6941.13,2846.09 6941.3,2846.26 13.2@6941.3,3020
XQ59: 9.17@6991.13,2846.09 13.3@6991.3,3020 | length 174
  Top Layer w10: 9.17@6991.13,2846.09 6991.13,3019.84 13.3@6991.3,3020
XQ60: 9.16@7041.13,2846.09 13.4@7041.3,3020 | length 174
  Top Layer w10: 9.16@7041.13,2846.09 7041.3,2846.26 13.4@7041.3,3020
XQ61: 9.15@7091.13,2846.09 13.5@7091.3,3020 | length 174
  Top Layer w10: 9.15@7091.13,2846.09 7091.13,3019.84 13.5@7091.3,3020
XQ62: 9.14@7141.13,2846.09 13.6@7141.3,3020 | length 174
  Top Layer w10: 9.14@7141.13,2846.09 7141.3,2846.26 13.6@7141.3,3020
XQ63: 9.13@7191.13,2846.09 13.7@7191.3,3020 | length 174
  Top Layer w10: 9.13@7191.13,2846.09 7191.13,3019.84 13.7@7191.3,3020
XQ64: 9.12@7241.13,2846.09 13.8@7241.3,3020 | length 174
  Top Layer w10: 9.12@7241.13,2846.09 7241.3,2846.26 13.8@7241.3,3020
XQ65: 6.1@3022,3028 12.19 | length 180.3
  Top Layer w10: 12.19@3021,2848.1 3022,2849.1 6.1@3022,3028
XQ66: 6.2@3072,3028 12.18@3071,2848.1 | length 180.3
  Top Layer w10: 12.18@3071,2848.1 3071,3027 6.2@3072,3028
XQ67: 6.3@3122,3028 12.17@3121,2848.1 | length 180.3
  Top Layer w10: 12.17@3121,2848.1 3122,2849.1 6.3@3122,3028
XQ68: 6.4@3172,3028 12.16@3171,2848.1 | length 180.3
  Top Layer w10: 12.16@3171,2848.1 3171,3027 6.4@3172,3028
XQ69: 6.5@3222,3028 12.15@3221,2848.1 | length 180.3
  Top Layer w10: 12.15@3221,2848.1 3222,2849.1 6.5@3222,3028
XQ70: 6.6@3272,3028 12.14@3271,2848.1 | length 180.3
  Top Layer w10: 12.14@3271,2848.1 3271,3027 6.6@3272,3028
XQ71: 6.7@3322,3028 12.13@3321,2848.1 | length 180.3
  Top Layer w10: 12.13@3321,2848.1 3322,2849.1 6.7@3322,3028
XQ72: 6.8@3372,3028 12.12@3371,2848.1 | length 180.3
  Top Layer w10: 12.12@3371,2848.1 3371,3027 6.8@3372,3028
XQ73: 7.1@3576.3,3027 15.19 | length 181
  Top Layer w10: 7.1@3576.3,3027 3576.3,2846.36 15.19@3576.56,2846.09
XQ74: 7.2@3626.3,3027 15.18@3626.56,2846.09 | length 181
  Top Layer w10: 7.2@3626.3,3027 3626.56,3026.73 15.18@3626.56,2846.09
XQ75: 7.3@3676.3,3027 15.17@3676.56,2846.09 | length 181
  Top Layer w10: 7.3@3676.3,3027 3676.3,2846.36 15.17@3676.56,2846.09
XQ76: 7.4@3726.3,3027 15.16@3726.56,2846.09 | length 181
  Top Layer w10: 7.4@3726.3,3027 3726.56,3026.73 15.16@3726.56,2846.09
XQ77: 7.5@3776.3,3027 15.15@3776.56,2846.09 | length 181
  Top Layer w10: 7.5@3776.3,3027 3776.3,2846.36 15.15@3776.56,2846.09
XQ78: 7.6@3826.3,3027 15.14@3826.56,2846.09 | length 181
  Top Layer w10: 7.6@3826.3,3027 3826.56,3026.73 15.14@3826.56,2846.09
XQ79: 7.7@3876.3,3027 15.13@3876.56,2846.09 | length 181
  Top Layer w10: 7.7@3876.3,3027 3876.3,2846.36 15.13@3876.56,2846.09
XQ80: 7.8@3926.3,3027 15.12@3926.56,2846.09 | length 181
  Top Layer w10: 7.8@3926.3,3027 3926.56,3026.73 15.12@3926.56,2846.09
XQ81: 4.19 14.1@7442.3,3016 | length 170.4
  Top Layer w10: 14.1@7442.3,3016 7442.3,2847.36 4.19@7443.56,2846.09
XQ82: 4.18@7493.56,2846.09 14.2@7492.3,3016 | length 170.4
  Top Layer w10: 14.2@7492.3,3016 7492.3,2847.36 4.18@7493.56,2846.09
XQ83: 4.17@7543.56,2846.09 14.3@7542.3,3016 | length 170.4
  Top Layer w10: 14.3@7542.3,3016 7543.56,3014.74 4.17@7543.56,2846.09
XQ84: 4.16@7593.56,2846.09 14.4@7592.3,3016 | length 170.4
  Top Layer w10: 14.4@7592.3,3016 7592.3,2847.36 4.16@7593.56,2846.09
XQ85: 4.15@7643.56,2846.09 14.5@7642.3,3016 | length 170.4
  Top Layer w10: 14.5@7642.3,3016 7643.56,3014.74 4.15@7643.56,2846.09
XQ86: 4.14@7693.56,2846.09 14.6@7692.3,3016 | length 170.4
  Top Layer w10: 14.6@7692.3,3016 7692.3,2847.36 4.14@7693.56,2846.09
XQ87: 4.13@7743.56,2846.09 14.7@7742.3,3016 | length 170.4
  Top Layer w10: 14.7@7742.3,3016 7743.56,3014.74 4.13@7743.56,2846.09
XQ88: 4.12@7793.56,2846.09 14.8@7792.3,3016 | length 170.4
  Top Layer w10: 14.8@7792.3,3016 7792.3,2847.36 4.12@7793.56,2846.09
XQ89: 7.19 12.1@6338.3,3019 | length 173.1
  Top Layer w10: 12.1@6338.3,3019 6338.3,2846.5 7.19@6338.71,2846.09
XQ90: 7.18@6388.71,2846.11 12.2@6388.3,3019 | length 173.1
  Top Layer w10: 12.2@6388.3,3019 6388.71,3018.59 7.18@6388.71,2846.11
XQ91: 7.17@6438.71,2846.09 12.3@6438.3,3019 | length 173.1
  Top Layer w10: 12.3@6438.3,3019 6438.3,2846.5 7.17@6438.71,2846.09
XQ92: 7.16@6488.71,2846.09 12.4@6488.3,3019 | length 173.1
  Top Layer w10: 12.4@6488.3,3019 6488.71,3018.59 7.16@6488.71,2846.09
XQ93: 7.15@6538.71,2846.09 12.5@6538.3,3019 | length 173.1
  Top Layer w10: 12.5@6538.3,3019 6538.3,2846.5 7.15@6538.71,2846.09
XQ94: 7.14@6588.71,2846.09 12.6@6588.3,3019 | length 173.1
  Top Layer w10: 12.6@6588.3,3019 6588.71,3018.59 7.14@6588.71,2846.09
XQ95: 7.13@6638.71,2846.09 12.7@6638.3,3019 | length 173.1
  Top Layer w10: 12.7@6638.3,3019 6638.3,2846.5 7.13@6638.71,2846.09
XQ96: 7.12@6688.71,2846.09 12.8@6688.3,3019 | length 173.1
  Top Layer w10: 12.8@6688.3,3019 6688.71,3018.59 7.12@6688.71,2846.09
XQ97: 8.1@4128.3,3029 10.19 | length 183.2
  Top Layer w10: 8.1@4128.3,3029 4128.3,2846.79 10.19@4128.99,2846.09
XQ98: 8.2@4178.3,3029 10.18@4178.99,2846.09 | length 183.2
  Top Layer w10: 8.2@4178.3,3029 4178.99,3028.31 10.18@4178.99,2846.09
XQ99: 8.3@4228.3,3029 10.17@4228.99,2846.09 | length 183.2
  Top Layer w10: 8.3@4228.3,3029 4228.3,2846.79 10.17@4228.99,2846.09
XQ100: 8.4@4278.3,3029 10.16@4278.99,2846.09 | length 183.2
  Top Layer w10: 8.4@4278.3,3029 4278.99,3028.31 10.16@4278.99,2846.09
XQ101: 8.5@4328.3,3029 10.15@4328.99,2846.09 | length 183.2
  Top Layer w10: 8.5@4328.3,3029 4328.3,2846.79 10.15@4328.99,2846.09
XQ102: 8.6@4378.3,3029 10.14@4378.99,2846.09 | length 183.2
  Top Layer w10: 8.6@4378.3,3029 4378.99,3028.31 10.14@4378.99,2846.09
XQ103: 8.7@4428.3,3029 10.13@4428.99,2846.09 | length 183.2
  Top Layer w10: 8.7@4428.3,3029 4428.3,2846.79 10.13@4428.99,2846.09
XQ104: 8.8@4478.3,3029 10.12@4478.99,2846.09 | length 183.2
  Top Layer w10: 8.8@4478.3,3029 4478.99,3028.31 10.12@4478.99,2846.09
XQ105: 13.19 15.1@7995.3,3016 | length 169.3
  Top Layer w10: 15.1@7995.3,3016 7996.3,3015 13.19@7996.3,2847.1
XQ106: 13.18@8046.3,2847.1 15.2@8045.3,3016 | length 169.3
  Top Layer w10: 15.2@8045.3,3016 8045.3,2848.1 13.18@8046.3,2847.1
XQ107: 13.17@8096.3,2847.1 15.3@8095.3,3016 | length 169.3
  Top Layer w10: 15.3@8095.3,3016 8096.3,3015 13.17@8096.3,2847.1
XQ108: 13.16@8146.3,2847.1 15.4@8145.3,3016 | length 169.3
  Top Layer w10: 15.4@8145.3,3016 8145.3,2848.1 13.16@8146.3,2847.1
XQ109: 13.15@8196.3,2847.1 15.5@8195.3,3016 | length 169.3
  Top Layer w10: 15.5@8195.3,3016 8196.3,3015 13.15@8196.3,2847.1
XQ110: 13.14@8246.3,2847.1 15.6@8245.3,3016 | length 169.3
  Top Layer w10: 15.6@8245.3,3016 8245.3,2848.1 13.14@8246.3,2847.1
XQ111: 13.13@8296.3,2847.1 15.7@8295.3,3016 | length 169.3
  Top Layer w10: 15.7@8295.3,3016 8296.3,3015 13.13@8296.3,2847.1
XQ112: 13.12@8346.3,2847.1 15.8@8345.3,3016 | length 169.3
  Top Layer w10: 15.8@8345.3,3016 8345.3,2848.1 13.12@8346.3,2847.1
XQ113: 9.1@4683.3,3028 16.19 | length 182.7
  Top Layer w10: 16.19@4681.42,2846.09 4683.3,2847.97 9.1@4683.3,3028
XQ114: 9.2@4733.3,3028 16.18 | length 182.7
  Top Layer w10: 16.18@4731.42,2846.09 4731.42,3026.12 9.2@4733.3,3028
XQ115: 9.3@4783.3,3028 16.17 | length 182.7
  Top Layer w10: 16.17@4781.42,2846.09 4783.3,2847.97 9.3@4783.3,3028
XQ116: 9.4@4833.3,3028 16.16 | length 182.7
  Top Layer w10: 16.16@4831.42,2846.09 4831.42,3026.12 9.4@4833.3,3028
XQ117: 9.5@4883.3,3028 16.15 | length 182.7
  Top Layer w10: 16.15@4881.42,2846.09 4883.3,2847.97 9.5@4883.3,3028
XQ118: 9.6@4933.3,3028 16.14 | length 182.7
  Top Layer w10: 16.14@4931.42,2846.09 4931.42,3026.12 9.6@4933.3,3028
XQ119: 9.7@4983.3,3028 16.13 | length 182.7
  Top Layer w10: 16.13@4981.42,2846.09 4983.3,2847.97 9.7@4983.3,3028
XQ120: 9.8@5033.3,3028 16.12 | length 182.7
  Top Layer w10: 16.12@5031.42,2846.09 5031.42,3026.12 9.8@5033.3,3028
XQVCC2: 
pads on no net: DC_IN.3 Designator141. Designator141.32 J1.10 J1.11 J1.12 J1_2.2 J1_2.3 J1_2.4 K1.1 K1.4 P1.1 U1.106 U5.9 U5.10 U5.11 U5.12 U5.15 USB2.4 USB2.6 USB2.7 USB2.8 USB2.9 USB2.MH1 USB2.MH2 USB_1.4 USB_1.6 USB_1.7 USB_1.8 USB_1.9 USB_1.MH1 USB_1.MH2 Y1.
copper on no net:
  other v1: 7810,1080 4440,1880 1967,2765 1390,2768 2174,2768 1553,2769
  other v2: 8200,200 8005.3,1123 8009.3,1544 8000,4020
  other v3: 3616.3,-5796 3801.3,-5796
  other v4: 3616.3,-5796 3801.3,-5796

## Polygon pours and split planes (outlines as drawn)
NetD4_1 on 03vcc "Bottom Solder-No Net" (hatched 90Degree grid 0 track 8, remove dead copper, pour order 43): -30,3080 9950,3080 9990,3120 9430,3680 8470,3680 680,3680 680,3730 680,3860 590,3950 160,3950 160,3770 170,3760 -30,3560 -30,3080
VCC5 on 03vcc "Bottom Solder-No Net" (hatched 90Degree grid 0 track 8, remove dead copper, pour order 41): 11.24,2950 21.24,2940 320,2940 3590,2940 3610,2920 9060,2920 9060,30 8650,-380 8550,-280 -850,-280 -850,2260 -370,2740 -170,2940 30,2940
VCC3.3M on 03vcc "Bottom Solder-No Net" (hatched 90Degree grid 0 track 8, remove dead copper, pour order 37): 3290,1790 3290,470 3350,410 3400,360 3910,360 3910,540 4020,650 4110,740 4640,740 5090,740 5130,780 5140,790 5140,2200 3320,2200 3310,2190 3290,2170 3290,1780
VCC3.3 on 03vcc "Bottom Solder-No Net" (hatched 90Degree grid 0 track 8, remove dead copper, pour order 33): 7010,1500 7600,1500 7600,540 7590,530 7580,520 6980,520 6980,1470 7010,1500
GND on 02gnd "Bottom Solder-No Net" (hatched 90Degree grid 0 track 8, remove dead copper, pour order 35): -180,4470 8670,4470 8850,4650 8810,4610 8810,-580 -970,-580 -980,-570 -200,210 -200,4480

## Keep-outs
Keep-Out Layer:
  lines w7.87: -6.7,210 -6.7,3935.04 ; 200,10 8310,10 ; 8500,210 8500,3935.04
  lines w10: -6.7,3935.04 ccw(c-6.7,4250) 308.26,4250 4036.3,4250 ccw(c4233.15,4250) 4430,4250 8185.04,4250 ccw(c8500,4250) 8500,3935.04 ; 0,210 cw(c0,13.15) 196.85,13.15 ; 8190,2230 ccw(c8225,2185) 8191.86,2231.39 ; 8306.3,16.3 cw(c8500,16.3) 8500,210

## Silkscreen, mask and mechanical layers (free items; w line width, h text height)
Top Overlay:
  lines w10: 5493.3,260 5498.3,260 ; 5498.3,260 5393.3,260 5383.3,270 5383.3,455 5388.3,460 5493.3,460 5498.3,455 5498.3,260
  text "6" at 730,3880 h60
  text "5" at 3214.3,3869 h60
  text "4" at 5760.3,3869 h60
  text "1" at 730,3790 h60
  text "2" at 3230,3760 h60
  text "3" at 5790,3760 h60
  text "3.3V" at 1010,1756.7 h60 r270
  text "5V" at 1763.3,1450 h60
  text "GND" at 1763.3,1340 h60
  text "BOOT1" at 2783.3,590 h31.5
  text "5V" at 4773.3,580 h39.37
  text "PB10" at 4763.3,470 h39.37
  text "BN0" at 5513.3,390 h39.37
  text "PB11" at 4763.3,380 h39.37
  text "BP0" at 5513.3,290 h39.37
  text "G" at 4773.3,280 h39.37
  text "BY" at 4773.3,170 h39.37
Bottom Overlay:
  lines w10: 2614.3,2453.66 7228.4,2453.66 ; 2616.38,29.56 7229.3,29.56

## Text inside footprints (layer, text, board x,y; h text height)
Designator141: Bottom Overlay "D14" at 2662.65,1177.95 h28 r90; Bottom Overlay "RS" at 2662.65,2063.78 h28 r90; Bottom Overlay "CS" at 2914.06,2065.08 h28 r90; Bottom Overlay "WR" at 2914.06,1965.08 h28 r90; Bottom Overlay "RST" at 2914.06,1880.08 h28 r90; Bottom Overlay "D1" at 2914.06,1760.08 h28 r90; Bottom Overlay "D2" at 2662.65,1763.58 h28 r90; Bottom Overlay "D3" at 2914.06,1665.08 h28 r90; Bottom Overlay "D4" at 2662.65,1665.16 h28 r90; Bottom Overlay "D5" at 2914.06,1565.08 h28 r90; Bottom Overlay "D6" at 2662.65,1561.81 h28 r90; Bottom Overlay "D8" at 2662.65,1478.15 h28 r90; Bottom Overlay "D9" at 2914.06,1370.08 h28 r90; Bottom Overlay "D12" at 2662.65,1276.38 h28 r90; Bottom Overlay "D15" at 2914.06,1075.08 h28 r90; Bottom Overlay "VDD" at 2914.06,880.08 h28 r90; Bottom Overlay "VDD" at 2662.65,779.33 h28 r90; Bottom Overlay "GND" at 2662.65,882.68 h28 r90; Bottom Overlay "VDD" at 2662.65,981.1 h28 r90; Bottom Overlay "D10" at 2662.65,1379.72 h28 r90; Bottom Overlay "D0" at 2662.65,1862.01 h28 r90; Bottom Overlay "RD" at 2662.65,1965.35 h28 r90; Bottom Overlay "GND" at 2662.65,1079.53 h28 r90; Bottom Overlay "GND" at 2914.06,785.08 h28 r90; Bottom Overlay "D11" at 2914.06,1275.08 h28 r90; Bottom Overlay "PEN" at 2914.06,580.08 h28.03 r90; Bottom Overlay "CLK" at 2662.65,484.06 h28.03 r90; Bottom Overlay "MOSI" at 2662.65,690.75 h28.03 r90; Bottom Overlay "MO" at 2662.65,562.8 h28.03 r90; Bottom Overlay "TCS" at 2914.06,480.08 h28.03 r90; Bottom Overlay "MISO" at 2914.06,695.08 h28.03 r90; Bottom Overlay "BL" at 2914.06,960.08 h28 r90; Bottom Overlay "D14" at 2662.88,1177.87 h28 r90; Bottom Overlay "RS" at 2662.88,2063.7 h28 r90; Bottom Overlay "CS" at 2914.3,2065 h28 r90; Bottom Overlay "WR" at 2914.3,1965 h28 r90; Bottom Overlay "RST" at 2914.3,1880 h28 r90; Bottom Overlay "D1" at 2914.3,1760 h28 r90; Bottom Overlay "D2" at 2662.88,1763.5 h28 r90; Bottom Overlay "D3" at 2914.3,1665 h28 r90; Bottom Overlay "D4" at 2662.88,1665.08 h28 r90; Bottom Overlay "D5" at 2914.3,1565 h28 r90; Bottom Overlay "D6" at 2662.88,1561.73 h28 r90; Bottom Overlay "D8" at 2662.88,1478.07 h28 r90; Bottom Overlay "D9" at 2914.3,1370 h28 r90; Bottom Overlay "D13" at 2914.69,1177.87 h28 r90; Bottom Overlay "D12" at 2662.88,1276.3 h28 r90; Bottom Overlay "D15" at 2914.3,1075 h28 r90; Bottom Overlay "VDD" at 2914.3,880 h28 r90; Bottom Overlay "VDD" at 2662.88,779.25 h28 r90; Bottom Overlay "GND" at 2662.88,882.6 h28 r90; Bottom Overlay "VDD" at 2662.88,981.02 h28 r90; Bottom Overlay "D10" at 2662.88,1379.65 h28 r90; Bottom Overlay "D0" at 2662.88,1861.93 h28 r90; Bottom Overlay "RD" at 2662.88,1965.28 h28 r90; Bottom Overlay "GND" at 2662.88,1079.45 h28 r90; Bottom Overlay "GND" at 2914.3,785 h28 r90; Bottom Overlay "D11" at 2914.3,1275 h28 r90; Bottom Overlay "PEN" at 2914.3,580 h28.03 r90; Bottom Overlay "CLK" at 2662.88,483.98 h28.03 r90; Bottom Overlay "MOSI" at 2662.88,690.67 h28.03 r90; Bottom Overlay "MO" at 2662.88,562.72 h28.03 r90; Bottom Overlay "TCS" at 2914.3,480 h28.03 r90; Bottom Overlay "MISO" at 2914.3,695 h28.03 r90; Bottom Overlay "BL" at 2914.3,960 h28 r90; Bottom Overlay "D7" at 2914.3,1480 h28 r90
Designator181: Top Overlay "5V" at 380,1710 h50; Top Overlay "GND" at 390,1610 h50
U2: Top Overlay "1" at 961.24,1500 h39.37 r270; Top Overlay "3" at 961.24,1320 h39.37 r270
U4: Top Overlay "1" at 299.97,1950.95 h39.37 r180; Top Overlay "3" at 119.97,1950.95 h39.37 r180